# Altium PCB nrf52840_bma250e.PcbDoc
Units mm, origin at the board's own origin, x right, y up, seen from the top; angles counter-clockwise.
Board outline 113 x 113 mm, 2 copper layers (Top Layer, Bottom Layer), stack 0.325 mm thick; 33 components, 63 nets, 164 pads, 121 vias.
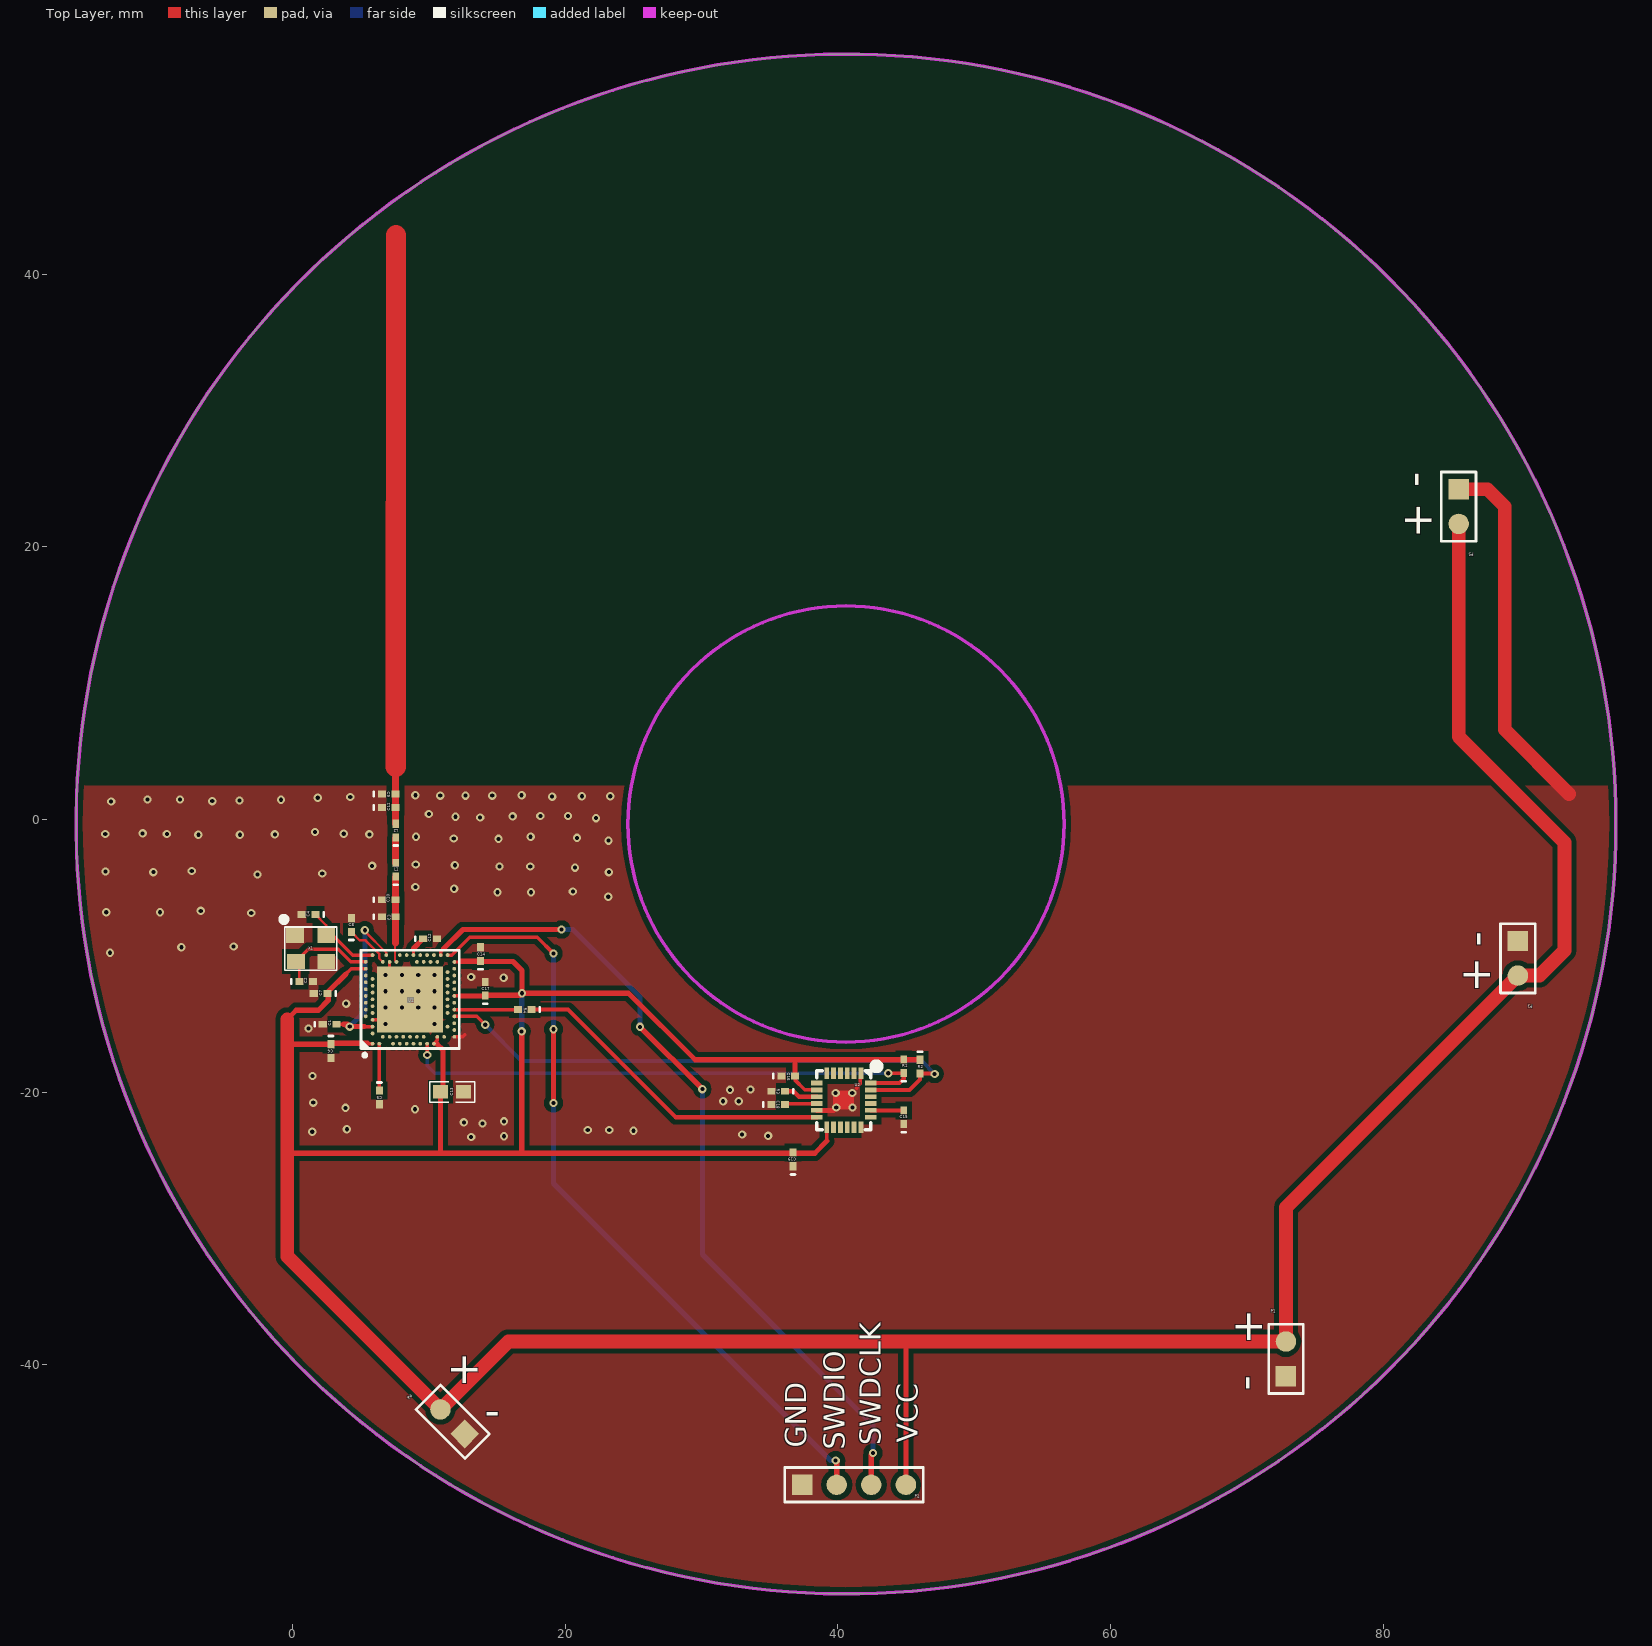
[diagram p0: Top Layer view]
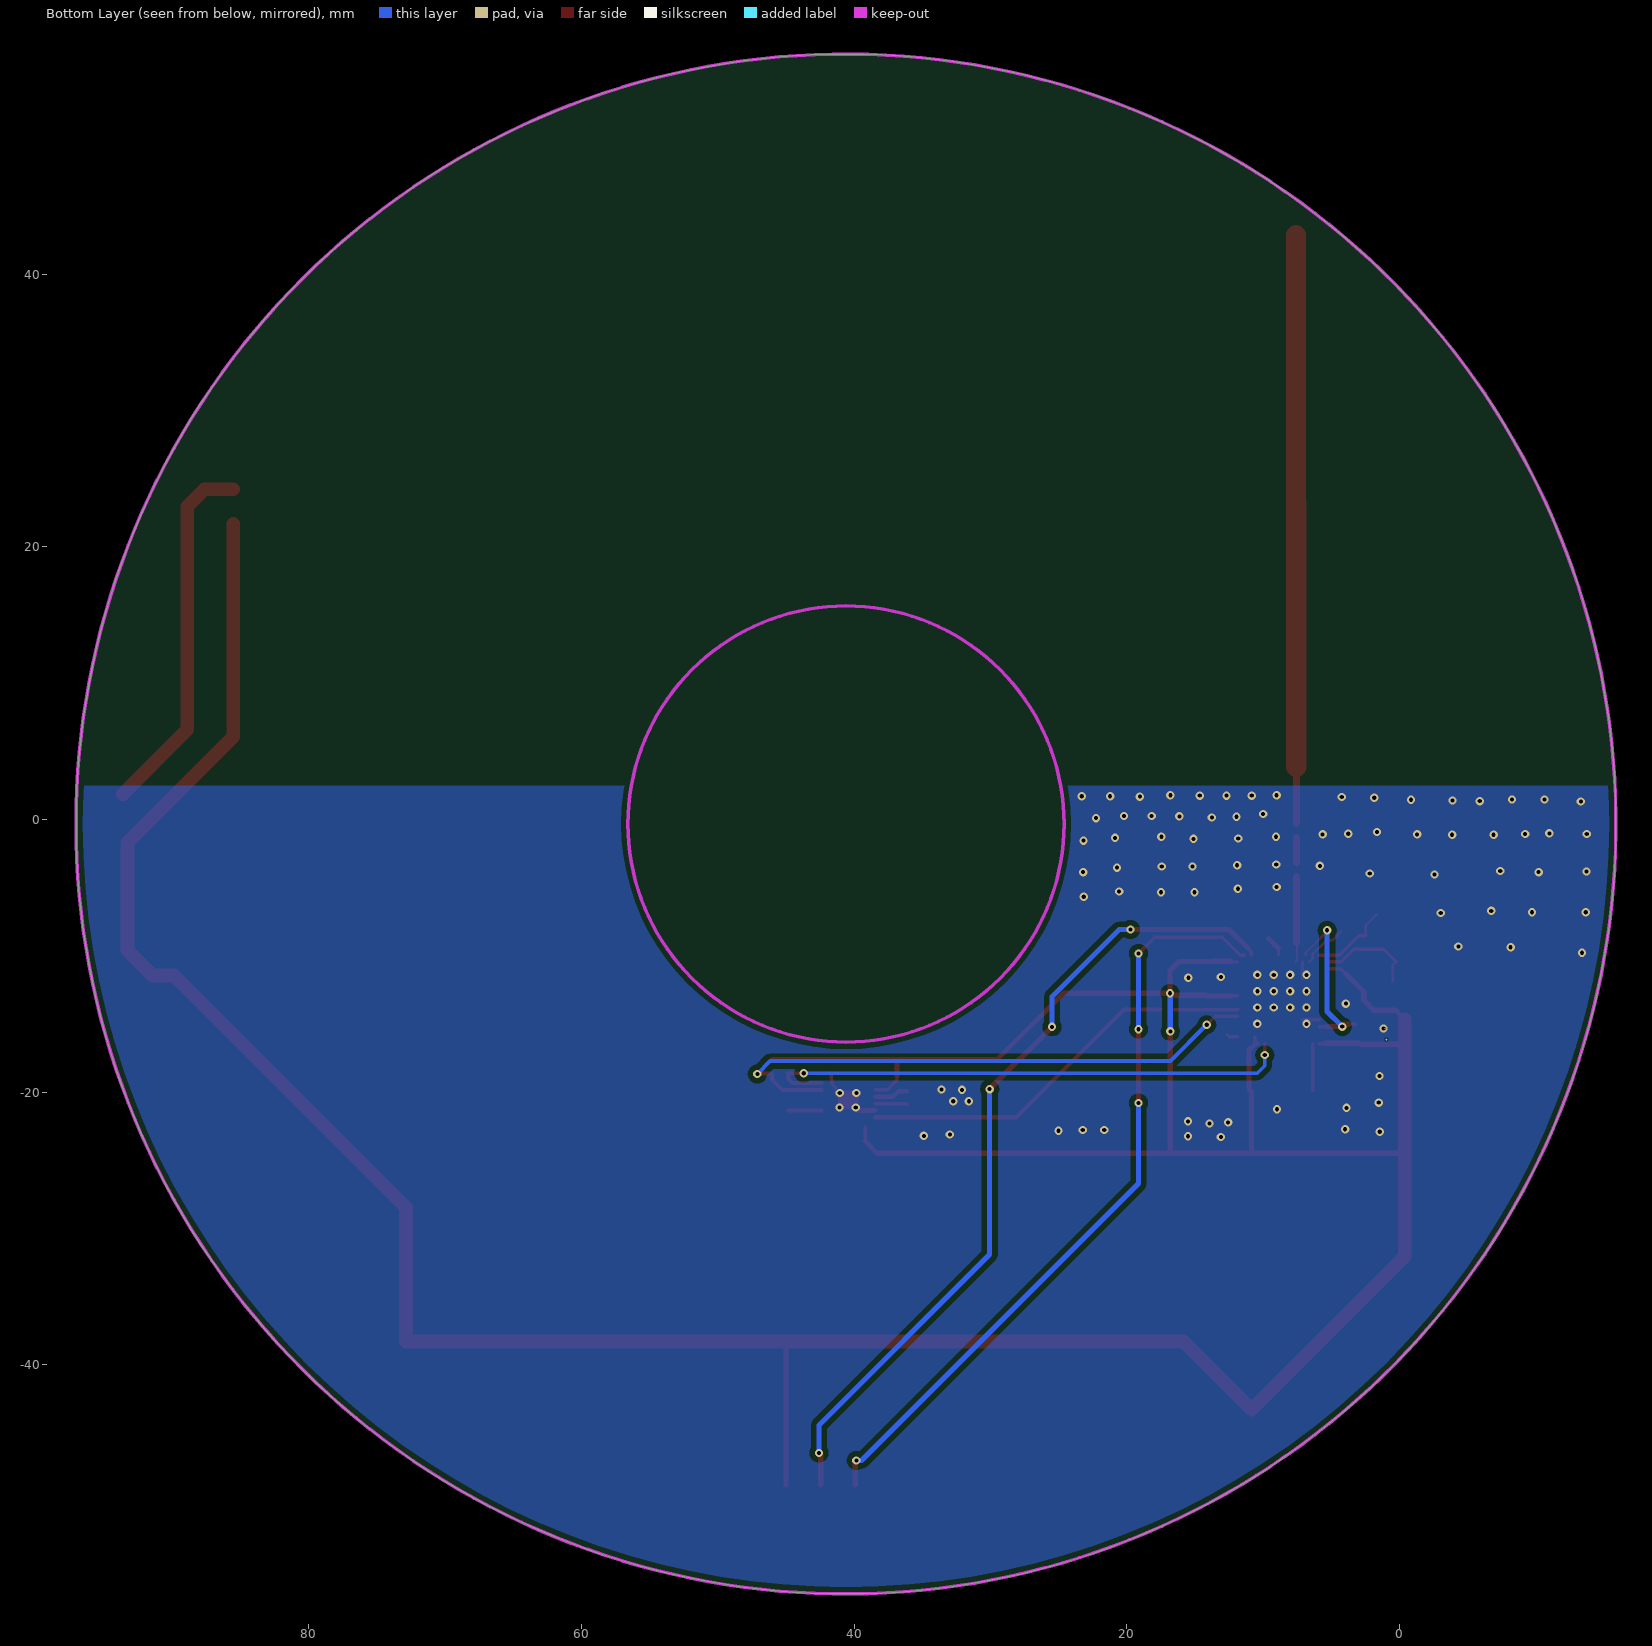
[diagram p1: Bottom Layer view, seen from below]

## Layer stack, top to bottom
Top Layer: signal copper 0.0356
Dielectric: core 0.254, FR-4, Dk 4.2
Bottom Layer: signal copper 0.0356

## Board outline
-15.911,-0.33 ccw(c40.589,-0.33) 40.589,-56.83 ccw(c40.589,-0.33) 97.089,-0.33 ccw(c40.589,-0.33) 40.589,56.17 ccw(c40.589,-0.33)

## Design rules (kind name [scope] priority, off if disabled: settings)
Clearance [All] p1: gap=0.127
ComponentClearance [All] p1 off: gap=0.254 collisioncheckmode=3 verticalgap=0.254 showdistances=FALSE
Height [All] p1 off: minheight=0 maxheight=25.4 prefheight=12.7
MinimumSolderMaskSliver [All] p1 off: minsoldermaskwidth=0.254
NetAntennae [All] p1 off: netantennaetolerance=0
PlaneConnect [All] p1: planeconnectstyle=Direct reliefexpansion=0.508 reliefentries=4 reliefconductorwidth=0.254 reliefairgap=0.254
PolygonConnect [All] p1: connectstyle=Direct reliefconductorwidth=0.254 reliefentries=4 polygonreliefangle="90 Angle"
RoutingVias [All] p1: holewidth=0.711 width=1.27 viastyle="Through Hole" minholewidth=0.711 minwidth=1.27 maxholewidth=0.711 maxwidth=1.27
SilkToSilkClearance [All] p1 off: silktosilkclearance=0.254
SilkscreenOverComponentPads SilkToSolderMaskClearance [IsPad] p1 off: minsilkscreentomaskgap=0.254
SolderMaskExpansion [All] p1: expansion=0.102
Width [All] p1: maxlimit=2.54 minlimit=0.025 preferedwidth=0.254 minimp=50.000000 maximp=50.000000 favimp=50.000000
21 further rules are at their usual default settings.

## Components (designator, comment, footprint, x,y, rotation, side; value= is the part's Value field where it differs from the comment)
C1 "1.0μF" 0402-A 2.7,-15.021 r0 top
C2 "12pF" 0402-A 0.981,-11.878 r0 top
C3 "NC" 0402-A 7.036,-7.137 r0 top
C4 "12pF" 0402-A 1.159,-6.975 r180 top
C5 "100nF" 0402-A 6.35,-20.396 r270 top
C6 "1.0μF" 0402-A 2.794,-16.993 r270 top
C7 "100nF" 0402-A 2.04,-12.761 r180 top
C8 "100pF" 0402-A 4.293,-7.747 r90 top
C9 "NC" 0402-A 7.036,1.88 r0 top
C10 "NC" 0402-A 7.036,-5.893 r0 top
C11 "NC" 0402-A 7.036,0.889 r0 top
C12 "820pF" 0402-A 10.074,-8.753 r0 top
C13 "4.7μF" 0603-1 11.684,-19.99 r0 top
C14 "100nF" 0402-a 13.767,-9.881 r90 top
C15 "2.2nf" 0402-A 44.831,-21.844 r90 top
C16 "0.1uF" 0402-A 36.347,-18.821 r0 top
C17 "100nF" 0402-a 14.122,-12.421 r90 top
C18 "0.1uF" 0402-A 35.611,-20.904 r0 top
C19 "0.1uF" 0402-A 36.703,-24.943 r90 top
L1 "NC" 0402-A 7.544,-3.683 r90 top
L2 "NC" 0402-A 7.544,-0.813 r90 top
P1 "Header 2" HDR1x2 72.873,-40.843 r90 top
P2 "Header 4" HDR1X4 37.363,-48.819 r0 top
P3 "Header 2" HDR1x2 89.891,-8.915 r270 top
P4 "Header 2" HDR1x2 12.624,-45.085 r135 top
P5 "Header 2" HDR1x2 85.547,24.232 r270 top
R1 "4.7K" 0402-A 44.831,-18.11 r90 top
R2 "4.7K" 0402-A 46.025,-18.136 r270 top
R3 "4.7K" 0402-A 35.611,-19.939 r180 top
R4 "0R" 0402-A 17.018,-13.945 r180 top
U1 "nRF52840-QIAA" AQFN50P700X700X85_HS-74N 8.601,-13.198 r90 top
U2 "mpu6050" mpu6050 41.681,-18.618 r270 top
X1 "32MHz" SMD3225 2.454,-8.525 r180 top

## Footprints (in the part's own frame and the unit in brackets; to place one, negate y for a bottom-side part, rotate by r counter-clockwise, add the part's x,y. Pads: shape width x height; smd on the part's side, far side on the other; paste and mask are expansions set on the pad)
0402-A [mm] "Chip Inductor; Body 1 x 0.5 mm (LxW typ"
  rect 0.6x0.5 smd: 1(-0.5,0) 2(0.5,0)
  silkscreen extent -1.1,-0.15 -1.1,0.15
0402-a [mm] "Chip Inductor; Body 1 x 0.5 mm (LxW typ)"
  rect 0.6x0.5 smd: 1(-0.5,0) 2(0.5,0)
  silkscreen extent -1.1,-0.15 -1.1,0.15
0603-1 [mm]
  rect 1.1x1 smd: 1(-0.85,0) 2(0.85,0)
  silkscreen extent -1.65,-0.76 1.65,0.76, body extent -1.14,-0.38 1.14,0.38, height 1
AQFN50P700X700X85_HS-74N [mm]
  rect 4.85x4.85 smd mask+0.05: 74(0,0)
  round 0.275 smd paste+0.012 mask+0.05: A8(-1.25,3.25) A10(-0.75,3.25) A12(-0.25,3.25) A14(0.25,3.25) A16(0.75,3.25) A18(1.25,3.25) A20(1.75,3.25) A22(2.25,3.25) A23(2.75,3.25) AA24(3.25,-2.25) AB2(-2.75,-2.5) AC5(-2,-2.75) AC9(-1,-2.75) AC11(-0.5,-2.75) AC13(0,-2.75) AC15(0.5,-2.75) AC17(1,-2.75) AC19(1.5,-2.75) AC21(2,-2.75) AC24(3.25,-2.75) AD2(-2.75,-3.25) AD4(-2.25,-3.25) AD6(-1.75,-3.25) AD8(-1.25,-3.25) AD10(-0.75,-3.25) AD12(-0.25,-3.25) AD14(0.25,-3.25) AD16(0.75,-3.25) AD18(1.25,-3.25) AD20(1.75,-3.25) AD22(2.25,-3.25) AD23(2.75,-3.25) B1(-3.25,2.75) B3(-2.5,2.75) B5(-2,2.75) B7(-1.5,2.75) B9(-1,2.75) B11(-0.5,2.75) B13(0,2.75) B15(0.5,2.75) B17(1,2.75) B19(1.5,2.75) B24(3.25,2.75) C1(-3.25,2.25) D2(-2.75,2) D23(2.75,2) E24(3.25,1.75) F2(-2.75,1.5) F23(2.75,1.5) G1(-3.25,1.25) H2(-2.75,1) H23(2.75,1) J1(-3.25,0.75) J24(3.25,0.75) K2(-2.75,0.5) L1(-3.25,0.25) L24(3.25,0.25) M2(-2.75,0) N1(-3.25,-0.25) N24(3.25,-0.25) P2(-2.75,-0.5) P23(2.75,-0.5) R1(-3.25,-0.75) R24(3.25,-0.75) T2(-2.75,-1) T23(2.75,-1) U1(-3.25,-1.25) U24(3.25,-1.25) V23(2.75,-1.5) W1(-3.25,-1.75) W24(3.25,-1.75) Y2(-2.75,-2) Y23(2.75,-2)
  silkscreen extent -4.21,-3.6 3.6,3.6, body extent -3.55,-3.55 3.55,3.55, height 0.85
HDR1x2 [mm] "Connector; Header; 2 Position"
  rect 1.5x1.5 smd: 1(0,0)
  round 1.5 smd: 2(2.54,0)
  silkscreen extent -1.27,-1.27 3.81,1.27
HDR1X4 [mm] "Connector; Header; 4 Position"
  rect 1.5x1.5 smd: 1(0,0)
  round 1.5 smd: 2(2.54,0) 3(5.08,0) 4(7.62,0)
  silkscreen extent -1.27,-1.27 8.89,1.27
mpu6050 [mm]
  rect 0.85x0.35 smd: 1(0,0) 2(0,-0.5) 3(0,-1) 4(0,-1.5) 5(0,-2) 6(0,-2.5) 13(3.95,-2.5) 14(3.95,-2) 15(3.95,-1.5) 16(3.95,-1) 17(3.95,-0.5) 18(3.95,0)
  rect 0.35x0.85 smd: 7(0.725,-3.225) 8(1.225,-3.225) 9(1.725,-3.225) 10(2.225,-3.225) 11(2.725,-3.225) 12(3.225,-3.225) 19(3.225,0.725) 20(2.725,0.725) 21(2.225,0.725) 22(1.725,0.725) 23(1.225,0.725) 24(0.725,0.725)
  Top Layer region: 1.27,-2.031 2.667,-2.031 2.667,-0.507 1.27,-0.507
  silkscreen extent -0.63,-3.22 4.13,1.27
SMD3225 [mm]
  rect 1.3x1.1 smd: 1(0,0) 2(2.3,0) 3(2.23,1.9) 4(0,1.9)
  silkscreen extent -0.76,-1.32 3.24,2.54

## Part data
C1 C6: library part C0603-1?, "Capacitor, X7R, ±10%"
C2 C4: library part C0402-12p, "Capacitor, NP0, ±2%"
C3 C9 C10: library part C0402-0.8p, "Capacitor, NP0, ±10%"
C5 C7 C14 C17: library part C0402-100n, "Capacitor, X7R, ±10%"
C8: library part C0402-100p, "Capacitor, NP0, ±5%"
C11 C15 C16 C18 C19: library part C0402-0.5p, "Capacitor, NP0, ±10%"
C12: library part C0402-820p, "Capacitor, NP0, ±5%"
C13: library part C0603-4μ7-6.3V-X, "Capacitor, X7R, ±10"
L1 L2: library part L0402-4n7, "High frequency chip inductor ±5%"
P1 P3 P4 P5: "Header, 2-Pin"
P2: "Header, 4-Pin"
R1 R2 R3 R4: library part Res1, "Resistor"
U1: library part nRF52840-QIAAD0, "Multi-protocol Bluetooth Low Energy, IEEE 802.15.4, ANT and 2.4GHz proprietary system-on-chip"
X1: library part XTAL_SMD2016_32MHz_8pF_General, "XTAL SMD 2016, 32MHz, Cl=8pF, Total Tol: ±40ppm"

## Via types
v1: diameter 0.61, hole 0.305, Top Layer to Bottom Layer, 121 vias

## Nets (pads, with @x,y where several pads share a name; then routed paths per layer and width w, separated by ;. In a path a pad name is that pad's centre, name@x,y a point inside that pad or via, vN(x,y) a via of type N, cw(c..) or ccw(c..) an arc to the next point about the centre after c; other vN are vias at no path point)
DEC1: C5.1 U1.C1 | length 3.4
  Top Layer w0.254: C5.1@6.351,-19.895 U1.C1
DEC3: C8.1 U1.D23 | length 3.4
  Top Layer w0.178: C8.1 4.913,-8.868 5.342,-8.868 6.34,-9.866 6.34,-10.188 U1.D23
DEC4_6: C1.2 U1.B5 U1.E24 | length 13.2
  Top Layer w0.178: v1(5.283,-8.128) 5.283,-8.212 6.851,-9.779 U1.E24
  Top Layer w0.254: C1.2 3.742,-15.021 3.919,-15.198 v1(4.173,-15.198) ; 5.24,-15.198 U1.B5
  Top Layer w0.381: 3.742,-15.021 3.996,-15.021 v1(4.173,-15.198) 5.24,-15.198
  Bottom Layer w0.381: v1(4.173,-15.198) 5.283,-14.089 v1(5.283,-8.128)
GND: C1.1 C2.2 C3.1 C4.2 C5.2 C6.2 C7.2 C8.2 C9.1 C10.1 C11.1 C12.2 C13.2 C14.2 C15.1 C16.1 C17.2 C18.1 C19.1 P1.1 P2.1 P3.1 P4.1 P5.1 R3.2 U1.74 U1.AD2 U1.B7 U1.F23 U2.1 U2.11 U2.18 X1.2 X1.4 | length 32.7
  Top Layer w0.145: U1.F23 U1.F23@7.101,-10.408
  Top Layer w0.229: U1.74@7.101,-11.698 U1.F23
  Top Layer w0.254: U1.B7 U1.74@7.101,-14.698 ; U1.AD2 12.466,-15.948 12.606,-15.809 ; 41.377,-19.71 41.377,-19.648 41.631,-19.394 41.631,-19.075 41.681,-19.025 U2.1
  Top Layer w0.356: U2.11 v1@39.668,-21.343
  Top Layer w1.016: P5.1 87.655,24.232 88.925,22.962 88.925,6.604 93.65,1.88
  other v1: 13.081,-23.292 15.494,-23.241 34.874,-23.216 32.969,-23.114 1.422,-22.911 24.994,-22.835 21.641,-22.784 23.216,-22.784 3.962,-22.733 13.919,-22.301 12.548,-22.225 15.494,-22.149 8.966,-21.26 3.861,-21.158 39.878,-21.133 41.072,-21.133 1.499,-20.777 31.572,-20.676 32.715,-20.676 39.827,-20.066 41.046,-20.066 32.08,-19.837 33.579,-19.812 1.448,-18.821 1.143,-15.342 6.801,-14.998 10.401,-14.998 6.801,-13.798 8.001,-13.798 9.201,-13.798 10.401,-13.798 3.912,-13.513 6.801,-12.598 8.001,-12.598 9.201,-12.598 10.401,-12.598 15.469,-11.608 13.081,-11.557 6.801,-11.398 8.001,-11.398 9.201,-11.398 10.401,-11.398 -13.411,-9.779 -8.179,-9.373 -4.343,-9.322 -3.048,-6.858 -13.691,-6.807 -9.754,-6.807 -6.756,-6.706 23.139,-5.664 15.011,-5.334 17.475,-5.334 20.549,-5.283 11.836,-5.08 8.992,-4.953 -2.591,-4.039 2.159,-3.962 -10.236,-3.861 23.19,-3.861 -13.741,-3.81 -7.417,-3.785 20.701,-3.531 15.164,-3.454 17.424,-3.454 5.817,-3.404 11.887,-3.353 9.017,-3.302 23.165,-1.549 15.088,-1.422 11.811,-1.397 20.853,-1.346 9.042,-1.27 17.45,-1.27 -6.934,-1.118 -3.886,-1.118 -1.321,-1.092 5.613,-1.092 -13.767,-1.067 -9.246,-1.067 3.734,-1.041 -11.024,-1.016 1.626,-0.914 22.25,0.102 13.741,0.152 11.938,0.203 16.129,0.229 18.161,0.254 20.193,0.254 9.982,0.406 -13.335,1.321 -5.918,1.346 -3.912,1.397 -0.864,1.448 -10.668,1.473 -8.28,1.473 1.829,1.6 4.216,1.651 19.025,1.676 21.209,1.702 23.292,1.702 10.82,1.753 12.675,1.753 14.63,1.753 8.992,1.778 16.789,1.778
NetC3_2: C3.2 C10.2 L1.1 U1.H23 | length 6.3
  Top Layer w0.145: 7.496,-9.114 7.496,-10.343 U1.H23
  Top Layer w0.508: 7.536,-9.074 L1.1@7.536,-4.191
NetC12_1: C12.1 U1.N24 | length 1.5
  Top Layer w0.203: U1.N24 8.851,-9.477
  Top Layer w0.381: 8.851,-9.477 C12.1
NetC15_2: C15.2 U2.20 | length 2.4
  Top Layer w0.305: U2.20 C15.2@44.83,-21.343
NetC18_2: C18.2 U2.10 | length 2.4
  Top Layer w0.254: C18.2 36.172,-20.843 U2.10
NetL1_2: L1.2 L2.1 | length 1.9
  Top Layer w0.508: L1.2 L2.1
NetR3_1: R3.1 U2.9 | length 2.5
  Top Layer w0.305: R3.1 36.728,-19.939 37.133,-20.343 U2.9
NetR4_1: R4.1 U2.12 | length 24.2
  Top Layer w0.305: R4.1 20.193,-13.945 28.092,-21.843 U2.12
P0.02/AIN0: U1.A12
P0.03/AIN1: U1.B13
P0.04/AIN2: U1.J1
P0.05/AIN3: U1.K2
P0.06: U1.L1
P0.07: U1.M2
P0.08: U1.N1
P0.09/NFC1: U1.L24
P0.10/NFC2: U1.J24
P0.11: U1.T2
P0.12: R1.1 U1.U1 U2.24 | length 39.8
  Top Layer w0.254: U1.U1 9.851,-17.27 v1(9.863,-17.282) ; v1(43.688,-18.618) R1.1@44.823,-18.618
  Top Layer w0.305: U2.24 44.512,-19.343 44.831,-19.025 R1.1
  Bottom Layer w0.254: v1(9.863,-17.282) 9.863,-18.067 10.414,-18.618 v1(43.688,-18.618)
P0.13: R2.2 U1.AD8 U2.23 | length 42.4
  Top Layer w0.254: U1.AD8 13.509,-14.448 v1(14.122,-15.062)
  Top Layer w0.305: U2.23 45.257,-19.843 46.025,-19.075 R2.2 47.058,-18.636 v1(47.092,-18.669)
  Bottom Layer w0.305: v1(14.122,-15.062) 16.789,-17.729 46.152,-17.729 v1(47.092,-18.669)
P0.14: U1.AC9
P0.15: R4.2 U1.AD10 | length 5.6
  Top Layer w0.254: 12.765,-13.948 U1.AD10 11.855,-13.945 R4.2
P0.16: U1.AC11
P0.17: U1.AD12
P0.18/RESET: U1.AC13
P0.19: U1.AC15
P0.20: U1.AD16
P0.21: U1.AC17
P0.22: U1.AD18
P0.23: U1.AC19
P0.24: U1.AD20
P0.25: U1.AC21
P0.26: U1.G1
P0.27: U1.H2
P0.28/AIN4: U1.B11
P0.29/AIN5: U1.A10
P0.30/AIN6: U1.B9
P0.31/AIN7: U1.A8
P1.00: U1.AD22
P1.01: U1.Y23
P1.02: U1.W24
P1.03: U1.V23
P1.04: U1.U24
P1.05: U1.T23
P1.06: U1.R24
P1.07: U1.P23
P1.08: U1.P2
P1.09: U1.R1
P1.10: U1.A20
P1.11: U1.B19
P1.12: U1.B17
P1.13: U1.A16
P1.14: U1.B15
P1.15: U1.A14
RF: C9.2 C11.2 L2.2 | length 43.2
  Top Layer w0.508: C9.2 7.536,3.853 ; L2.2 C9.2@7.544,1.872
  Top Layer w1.5: 7.544,3.861 7.569,42.861
SWDCLK: P2.3 U1.AA24 | length 60.4
  Top Layer w0.254: U1.AA24 10.851,-9.704 11.082,-9.473
  Top Layer w0.381: 11.079,-9.469 12.481,-8.068 v1(19.72,-8.068) ; v1(25.476,-15.215) v1(30.048,-19.787) ; P2.3 v1@42.443,-46.609
  Bottom Layer w0.381: v1(19.72,-8.068) 20.539,-8.068 25.476,-13.005 v1(25.476,-15.215) ; v1(30.048,-19.787) 30.048,-31.928 42.57,-44.45 v1(42.57,-46.482)
SWDIO: P2.2 U1.AC24 | length 56.6
  Top Layer w0.254: U1.AC24 11.667,-9.948 12.979,-8.636 17.932,-8.636 v1(19.126,-9.83)
  Top Layer w0.381: v1(19.126,-20.803) v1(19.126,-15.392) ; v1(39.827,-47.041) 39.903,-47.117 P2.2
  Bottom Layer w0.381: v1(19.126,-20.803) 19.126,-26.721 39.446,-47.041 v1(39.827,-47.041) ; v1(19.126,-15.392) v1(19.126,-9.83)
VDD_NRF: C6.1 C7.1 C13.1 C14.1 C16.2 C17.1 C19.2 P1.2 P2.4 P3.2 P4.2 P5.2 R1.2 R2.1 U1.A22 U1.AD14 U1.AD23 U1.B1 U1.W1 U1.Y2 U2.8 U2.13 | length 302.4
  Top Layer w0.203: U1.AD23 12.353,-10.448
  Top Layer w0.254: 3.894,-11.338 4.284,-10.948 U1.A22 ; 5.463,-16.424 5.487,-16.448 U1.B1 ; U1.W1 10.601,-16.198 U1.Y2 ; U1.AD14 12.259,-12.948 ; 15.824,-24.486 15.867,-24.443 ; C16.2 36.847,-19.118 37.572,-19.843 U2.8 ; 39.181,-23.597 U2.13
  Top Layer w0.381: -0.406,-24.359 -0.279,-24.486 10.82,-24.486 ; -0.406,-14.656 0.254,-13.995 1.88,-13.995 2.591,-13.284 2.591,-12.642 3.894,-11.338 ; -0.262,-16.493 C6.1 ; C6.1@2.876,-16.424 5.463,-16.424 ; 10.557,-16.45 11.014,-16.907 11.014,-19.81 C13.1 10.834,-24.472 10.82,-24.486 ; 12.259,-12.948 14.095,-12.948 C17.1 14.14,-12.903 16.662,-12.903 v1(16.815,-12.751) ; 12.353,-10.404 C14.1@13.618,-10.404 ; C14.1 13.8,-10.414 16.154,-10.414 16.815,-11.074 v1(16.815,-12.751) ; v1(16.789,-15.545) 16.789,-24.486 ; C16.2 36.847,-17.644 ; 39.181,-23.597 38.292,-24.486 16.789,-24.486 ; P2.4 44.983,-38.329 ; R2.1 29.523,-17.636 24.638,-12.751 v1(16.815,-12.751) ; 10.82,-24.486 15.824,-24.486 16.789,-24.486
  Top Layer w1.016: -0.406,-14.656 -0.406,-24.359 -0.406,-32.055 P4.2 15.813,-38.303 P1.2 72.873,-28.473 P3.2 91.465,-11.455 93.32,-9.601 93.32,-1.676 85.547,6.096 P5.2
  Bottom Layer w0.381: v1(16.789,-15.545) v1@16.789,-12.776
XC1: C4.1 U1.B24 X1.1 | length 5.9
  Top Layer w0.178: C4.1 2.454,-7.771 X1.1
  Top Layer w0.254: X1.1 2.962,-8.525 4.386,-9.948 U1.B24
XC2: C2.1 U1.A23 X1.3 | length 7.4
  Top Layer w0.178: X1.3 0.481,-10.682 C2.1
  Top Layer w0.254: X1.3 1.134,-9.515 3.318,-9.515 4.251,-10.448 U1.A23
pads on no net: U1.A18 U1.AB2 U1.AC5 U1.AD4 U1.AD6 U1.B3 U1.D2 U1.F2 U2.2 U2.3 U2.4 U2.5 U2.6 U2.7 U2.14 U2.15 U2.16 U2.17 U2.19 U2.21 U2.22

## Polygon pours and split planes (outlines as drawn)
GND on Top Layer "Bottom Layer-No Net 1" (solid, remove dead copper, pour order 2): 5.41,2.489 106.426,2.489 106.426,-54.102 102.133,-58.395 100.762,-59.766 -24.003,-59.766 -24.003,0.94 -25.603,2.54
GND on Bottom Layer "Bottom Layer-No Net 1" (solid, remove dead copper, pour order 4): -25.832,2.616 -25.679,2.464 106.35,2.464 106.35,-70.282 112.852,-76.784 102.184,-66.116 -27.965,-66.116

## Keep-outs
Keep-Out Layer:
  circle w0.254: c40.589,-0.33 r56.5
  circle w0.254: c40.589,-0.33 r16

## Silkscreen, mask and mechanical layers (free items; w line width, h text height)
Top Overlay:
  text "-" at 83.363,24.384 h2.29 r90
  text "+" at 83.566,20.625 h2.29 r90
  text "-" at 87.884,-9.322 h2.29 r90
  text "+" at 87.859,-12.725 h2.29 r90
  text "+" at 71.145,-38.532 h2.29 r90
  text "+" at 13.564,-41.707 h2.29 r90
  text "-" at 70.968,-41.935 h2.29 r90
  text "-" at 14.072,-44.501 h2.29
  text "VCC" at 45.847,-45.745 h1.52 r90
  text "SWDCLK" at 43.155,-45.923 h1.52 r90
  text "GND" at 37.668,-46.101 h1.52 r90
  text "SWDIO" at 40.513,-46.253 h1.52 r90
Bottom Overlay:
  text "-" at 0.973,-15.428 h0.2
  text "+" at 0.846,-16.063 h0.2 r270
Top Solder:
  lines w1.5: 7.544,3.937 7.569,42.937